# Altium PCB 拼版-max7219-tm1638-MOS板mp3.PcbDoc (part 1 of 2)
Units mil, origin at the board's own origin, x right, y up, seen from the top; angles counter-clockwise.
Board outline 3937.01 x 3937.01 mil, 2 copper layers (Top Layer, Bottom Layer); 103 components, 91 nets, 367 pads, 134 vias.
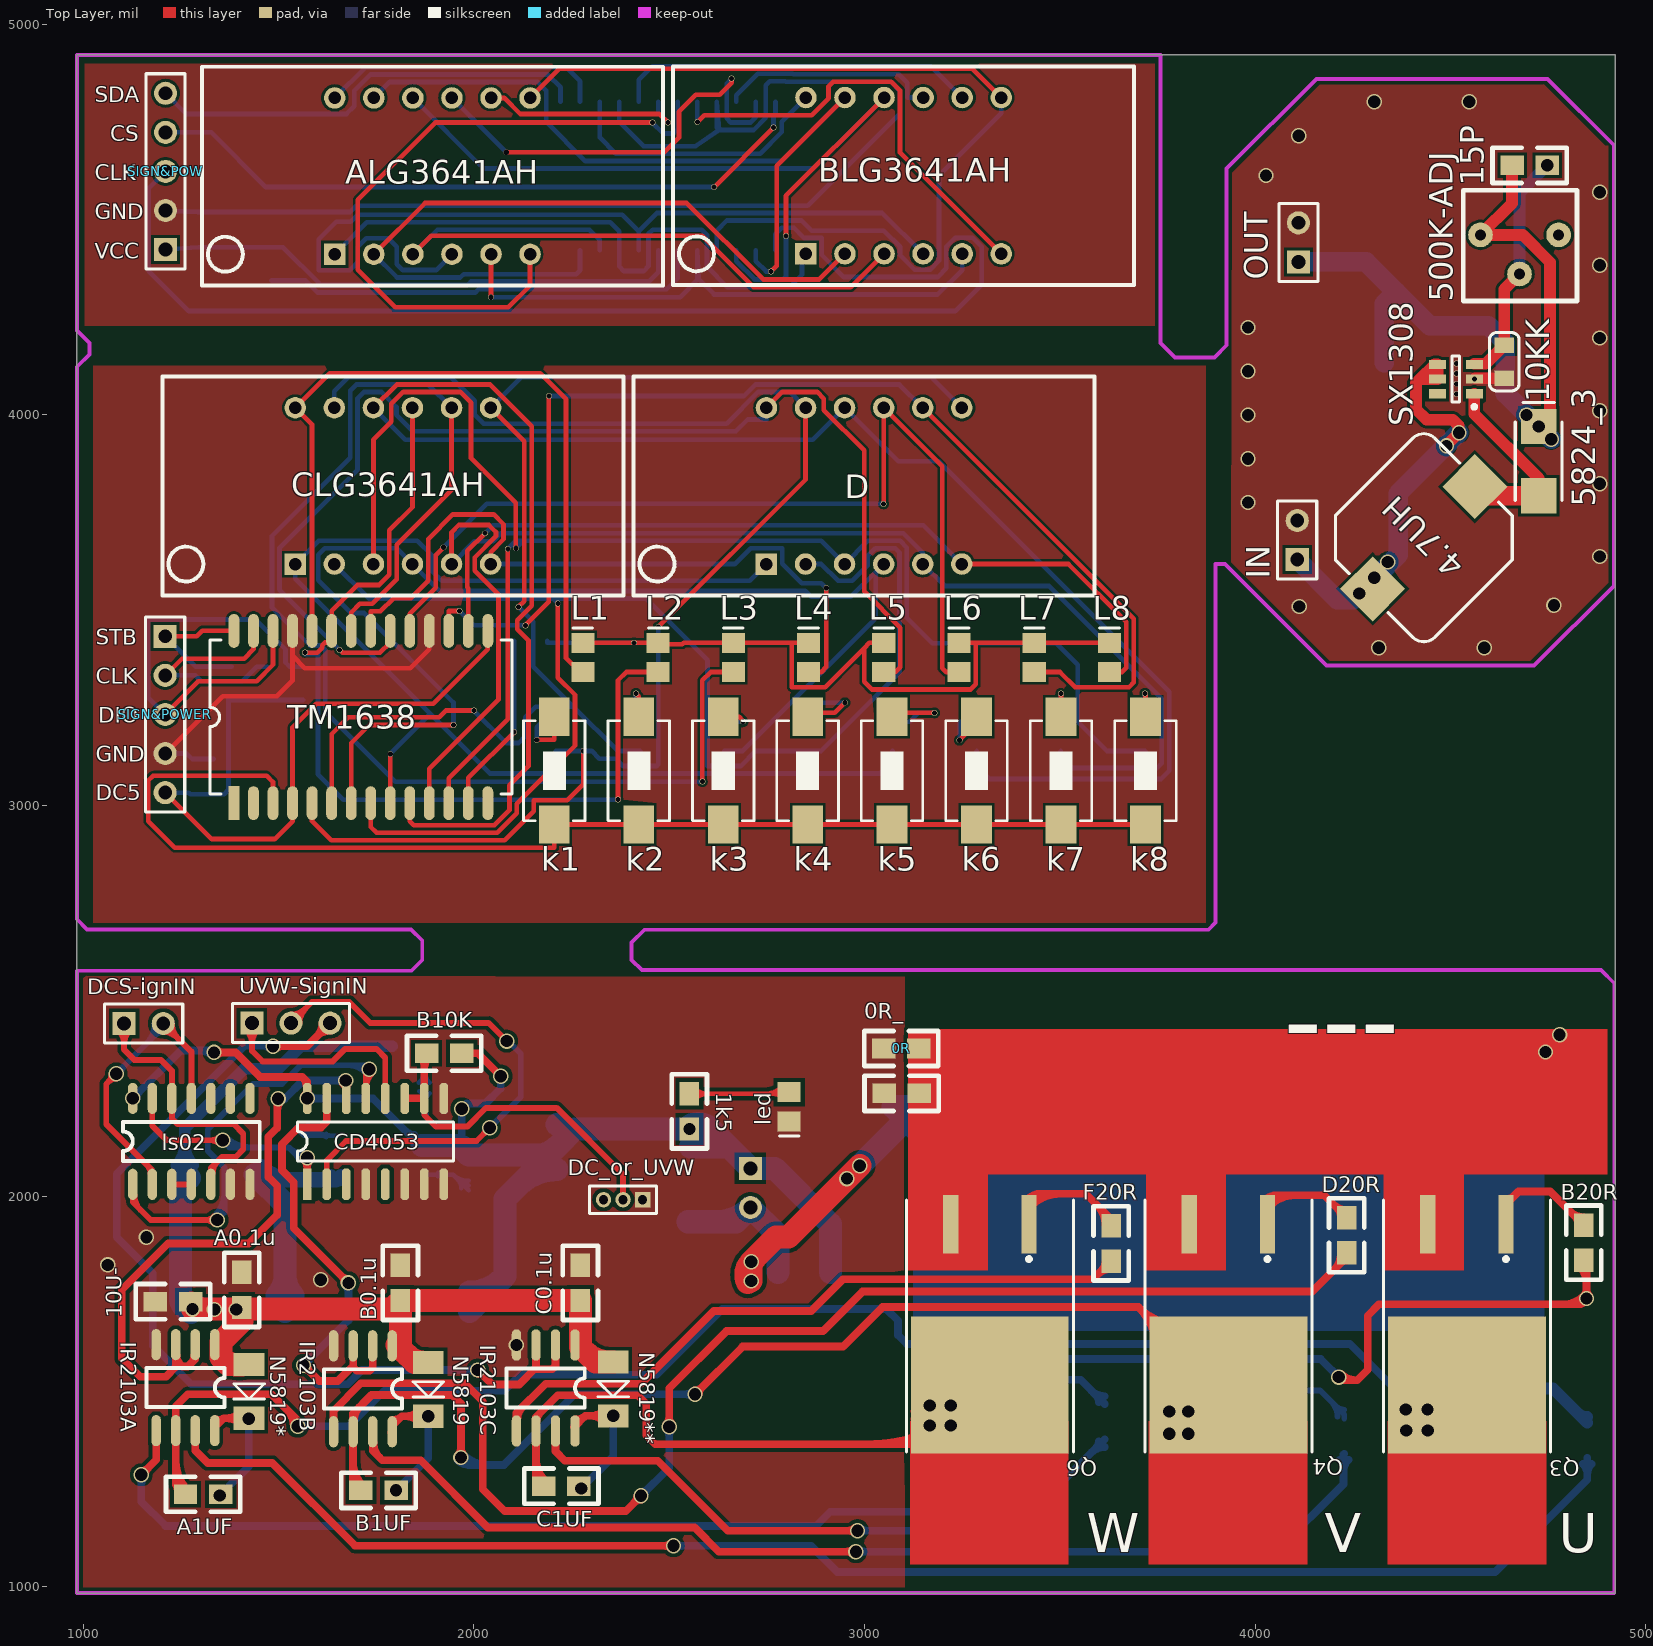
[diagram p0: Top Layer view]
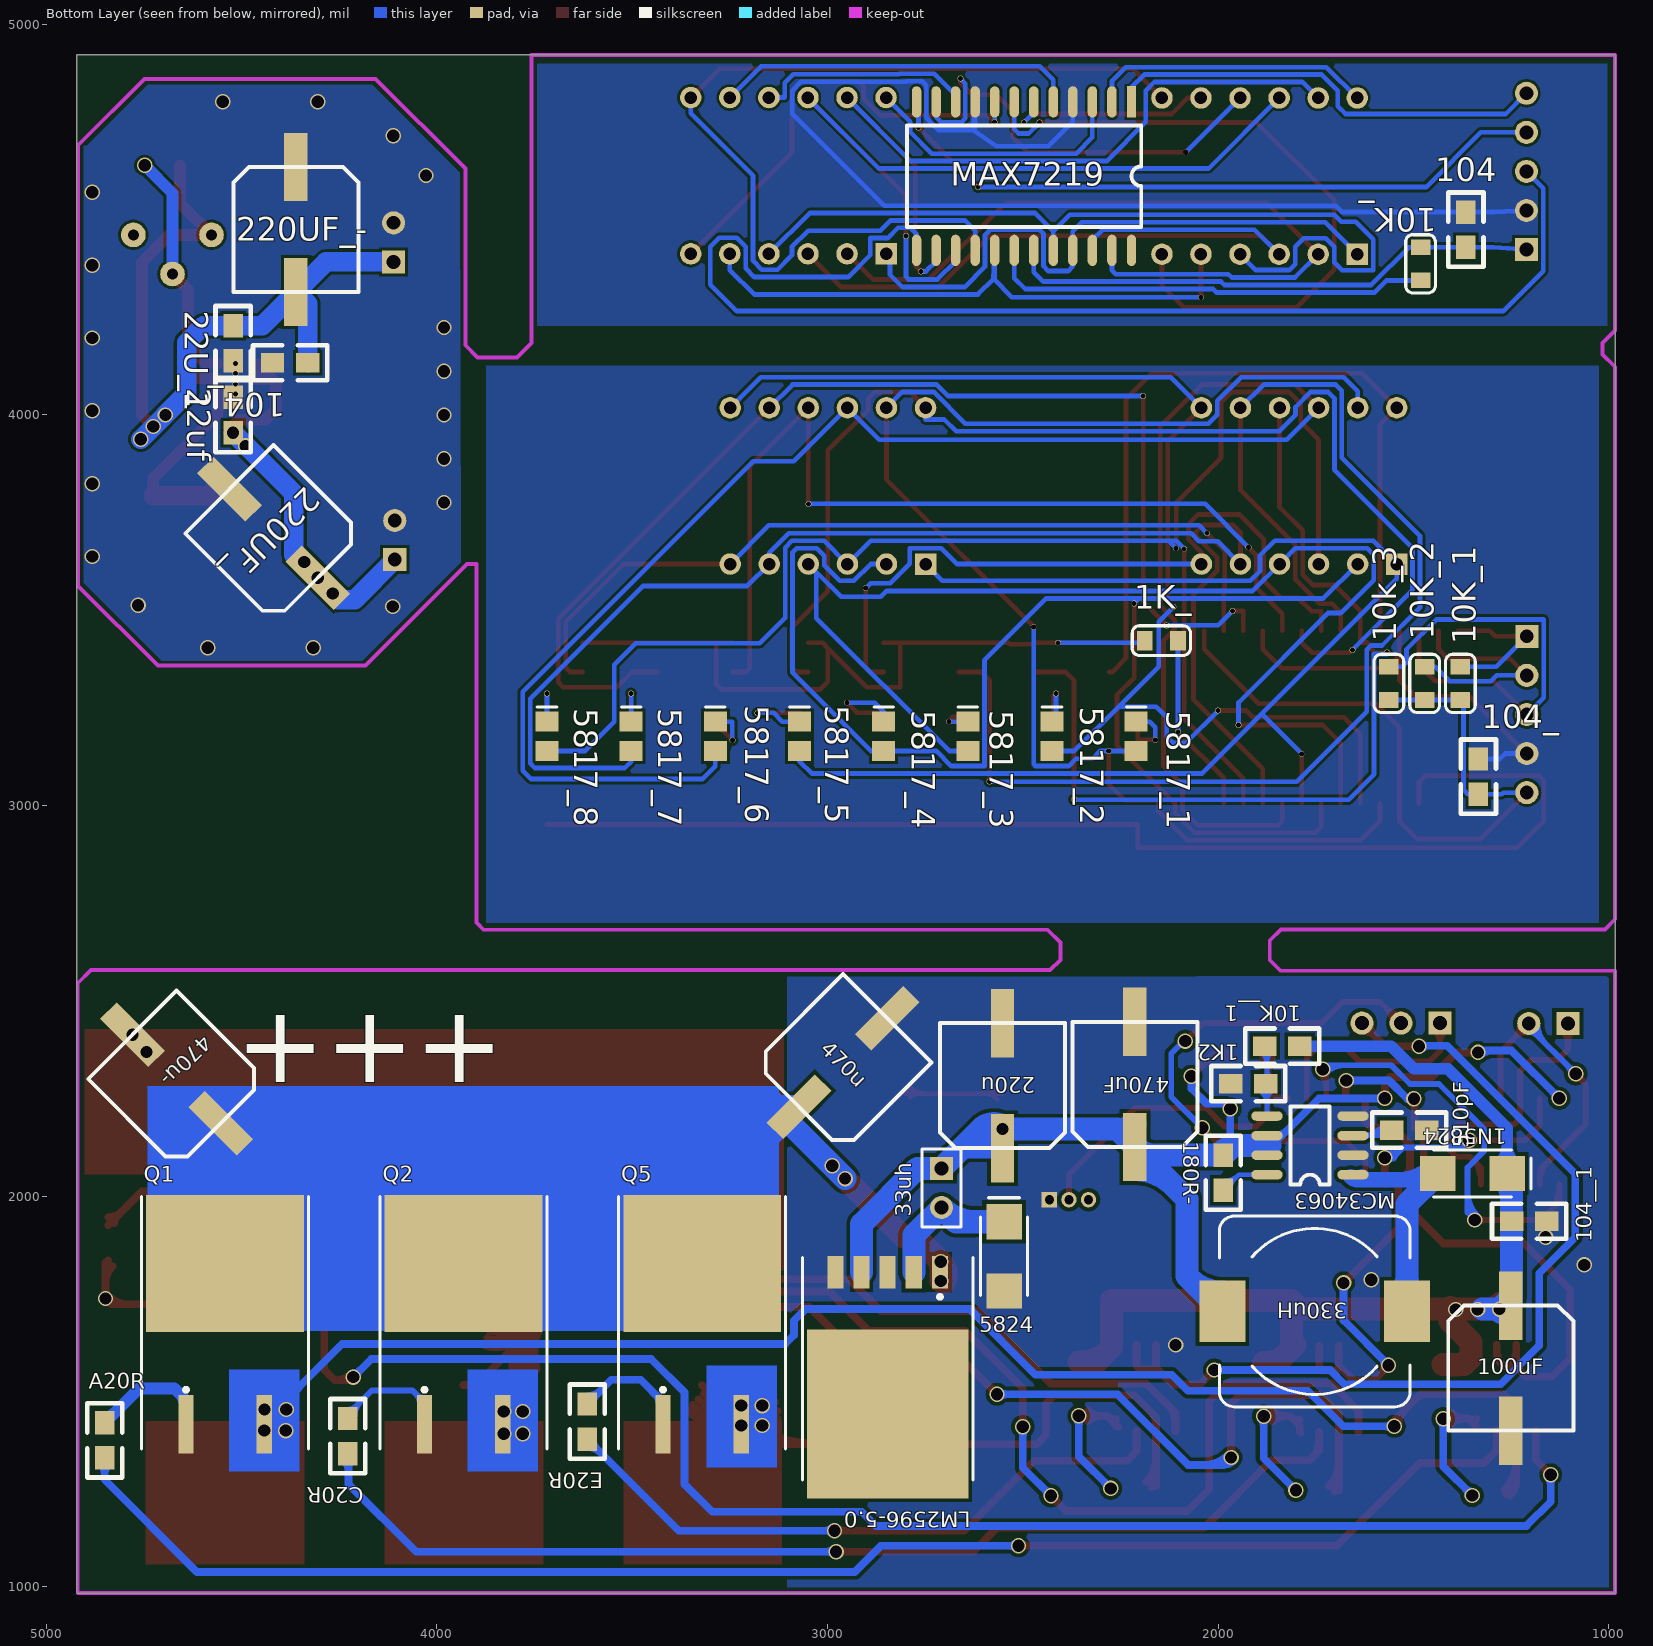
[diagram p1: Bottom Layer view, seen from below]

## Layer stack, top to bottom
Top Layer: signal copper 1.4
Dielectric: dielectric 12.6, FR-4, Dk 4.8
Bottom Layer: signal copper 1.4

## Board outline
984.25,984.25 4921.26,984.25 4921.26,4921.26 984.25,4921.26

## Design rules (kind name [scope] priority, off if disabled: settings)
Clearance [All] p1: gap=7
ComponentClearance [All] p1 off: gap=10 collisioncheckmode=3 verticalgap=10 showdistances=FALSE
PolygonConnect [All] p1: connectstyle=Direct reliefconductorwidth=10 reliefentries=4 polygonreliefangle="90 Angle"
RoutingVias [All] p1: holewidth=12 width=15 viastyle="Through Hole" minholewidth=12 minwidth=15 maxholewidth=100 maxwidth=100
SilkscreenOverComponentPads [All] p1: minsilkscreentomaskgap=10
SolderMaskExpansion [All] p1: expansion=4
Width Width_1 [All] p1: maxlimit=200 minlimit=8 preferedwidth=15
26 further rules are at their usual default settings.

## Classes and differential pairs
component class Sheet1: 1K_4_- 1K_5__ 10k_3_ 104-

## Components (designator, comment, footprint, x,y, rotation, side; value= is the part's Value field where it differs from the comment)
0R "Res2" 0805 3049,2378 r0 top
0R_ "Res2" 0805 3050,2263 r0 top
1K2 "1K2" 0805 1878,2288 r0 bottom
1k5 "1K5" 0805 2552,2172 r90 top
1K_ "Res2" "RES 0805_1" 2188,3422 r180 bottom
1N5824 "1N5819" DIODE-SMA 1349,2058 r180 bottom
4.7UH "Inductor" L-SMD-10 4431.6,3685.4 r225 top
10K_ "Res2" "RES 0805_1" 1482,4429 r270 bottom
10K_1 "Res2" "RES 0805_1" 1380,3270 r90 bottom
10K_2 "Res2" "RES 0805_1" 1471.5,3270 r90 bottom
10k_3 "Res2" "RES 0805_1" 1563,3270 r90 bottom
10K__1 "10K" 0805 1791,2384 r0 bottom (schematic designator 10K_)
10KK "Res2" "RES 0805_1" 4637.6,4178.4 r270 top
10U- "0.1u2" 0805 1275,1730 r180 top
15P "Cap" 0805_C 4747.6,4638.4 r180 top
22U_1 "Cap" 0805_C 4521.6,4228.4 r270 bottom (schematic designator 22U)
22uf "Cap" 0805_C 4521.6,3954.4 r90 bottom
33uh "Header 2" HDR1X2 2708,2071 r270 bottom
100uF "100uF/25V/C" capso_8*10 1251,1560 r90 bottom
104 "Cap" 0805_C 1366,4429 r90 bottom
104_ "Cap" 0805_C 1334,3029.03 r90 bottom
104_- "Cap" 0805_C 4330.6,4133.4 r0 bottom
104__1 "0.1u2" 0805 1249,1936 r180 bottom (schematic designator 104_)
180R- "180R" 0805 1987,2015 r90 bottom
220u "Cap" capso_8*10 2552,2283 r270 bottom
220UF_ "Cap Pol1" capso_8*10 4417.6,3696.4 r225 bottom
220UF_- "Cap Pol1" capso_8*10 4360.6,4474.4 r90 bottom
330uH "330uH" L-SMD-12 1753,1705 r0 bottom
470u "Cap" capso_8*10 2960,2342 r315 bottom
470u- "CAP 220" capso_8*10 4666,2300 r225 bottom
470uF "470uF/25V/D" capso_8*10 2213,2286 r270 bottom
500K-ADJ "MHDR1X3" pot（正方形） 4618.6,4535.4 r270 top
510pF "510pF" 0805 1466,2169 r0 bottom
5817_1 "1N5819" LED_0805 2210,3177 r90 bottom
5817_2 "1N5819" LED_0805 2425.43,3177 r90 bottom
5817_3 "1N5819" LED_0805 2640.86,3177 r90 bottom
5817_4 "1N5819" LED_0805 2856.29,3177 r90 bottom
5817_5 "1N5819" LED_0805 3071.71,3177 r90 bottom
5817_6 "1N5819" LED_0805 3287.14,3177 r90 bottom
5817_7 "1N5819" LED_0805 3502.57,3177 r90 bottom
5817_8 "1N5819" LED_0805 3718,3177 r90 bottom
5824 "Diode" DIODE-SMA 2548,1846 r90 bottom
5824_3 "1N5819" DIODE-SMA 4725.6,3881.4 r90 top
A0.1u "0.1u2" 0805 1406,1715 r90 top
A1UF "0.1u2" 0805 1262,1237 r0 top
A20R "R1" 0805 4850,1330 r90 bottom
ALG3641AH "LG5641AH" LG3641 1644,4411 r0 top
B0.1u "0.1u2" 0805 1812,1733 r90 top
B1UF "0.1u2" 0805 1711,1247 r0 top
B10K "Res2" 0805 1879,2366 r0 top
B20R "R3" 0805 4841,1836 r90 top
BLG3641AH "LG5641AH" LG3641 2850,4412 r0 top
C0.1u "0.1u2" 0805 2273,1733 r90 top
C1UF "0.1u2" 0805 2179,1258 r0 top
C20R "R2" 0805 4228,1431 r270 bottom
CD4053 "Header 8X2A" SOP16 1730,2138 r0 top
CLG3641AH "LG5641AH" LG3641 1543,3618 r0 top
D "LG5641AH" LG3641 2749,3618 r0 top
D20R "R4" 0805 4234,1945 r270 top
DC_or_UVW "MHDR1X3" MHDR1X3 2432,1991 r180 top
DCS-ignIN "Header 2" HDR1X2 1105,2442 r0 top
E20R "R2" 0805 3615,1468 r270 bottom
F20R "R4" 0805 3631,1924 r270 top
IN "Header 2" HDR1X2 4107.6,3629.4 r90 top
IR2103A "Header 4X2A" SOP8 1262,1505 r270 top
IR2103B "Header 4X2A" SOP8 1716,1502 r270 top
IR2103C "Header 4X2A" SOP8 2184,1504 r270 top
k1 "SW-PB" SW_PB2_A1 2206,3087 r0 top
k2 "SW-PB" SW_PB2_A1 2422.14,3087 r0 top
k3 "SW-PB" SW_PB2_A1 2638.29,3087 r0 top
k4 "SW-PB" SW_PB2_A1 2854.43,3087 r0 top
k5 "SW-PB" SW_PB2_A1 3070.57,3087 r0 top
k6 "SW-PB" SW_PB2_A1 3286.71,3087 r0 top
k7 "SW-PB" SW_PB2_A1 3502.86,3087 r0 top
k8 "SW-PB" SW_PB2_A1 3719,3087 r0 top
L1 "LED" LED_0805 2279,3379 r90 top
L2 "LED" LED_0805 2471.57,3379 r90 top
L3 "LED" LED_0805 2664.14,3379 r90 top
L4 "LED" LED_0805 2856.71,3379 r90 top
L5 "LED" LED_0805 3049.29,3379 r90 top
L6 "LED" LED_0805 3241.86,3379 r90 top
L7 "LED" LED_0805 3434.43,3379 r90 top
L8 "LED" LED_0805 3627,3379 r90 top
led "LED" LED_0805 2807,2229 r270 top
LM2596-5.0 "LM2596S" TO-263-5 2846,1639 r0 bottom
ls02 "74ls02" SO-14 1127,2030.32 r90 top
MAX7219 "Header 12X2A" SO-24W 2222,4800 r270 bottom
MC34063 "MC34063" SOP8 1770,2130 r0 bottom
N5819 "1N5819" D1206 1884,1575 r270 top
N5819* "1N5819" D1206 1425,1570 r270 top
N5819** "1N5819" D1206 2357,1576 r270 top
OUT "Header 2" HDR1X2 4110.6,4391.4 r90 top
Q1 "LR7843" TO-263 4542,1621.8 r180 bottom
Q2 "LR7843" TO-263 3931.5,1621.8 r180 bottom
Q3 "LR7843" TO-263 4542,1722 r180 top
Q4 "LR7843" TO-263 3931.5,1722 r180 top
Q5 "LR7843" TO-263 3321,1621.8 r180 bottom
Q6 "LR7843" TO-263 3321,1722 r180 top
SIGN&POW "Header 5" HDR1X5 1211,4423 r90 top
SIGN&POWER "Header 5" HDR1X5 1210,3433 r270 top
SX1308 "Header 3X2A" SOT23-6 4513.6,4091.4 r180 top
TM1638 "Header 14X2A" SOP28 1386,3006 r90 top
UVW-SignIN "Header 3" HDR1X3 1432,2443 r0 top

## Footprints (in the part's own frame and the unit in brackets; to place one, negate y for a bottom-side part, rotate by r counter-clockwise, add the part's x,y. Pads: shape width x height; smd on the part's side, far side on the other; paste and mask are expansions set on the pad)
0805 [mil]
  rect 60x50 smd: 1(0,0) 2(90,0)
  silkscreen extent -50,-45 140,45
0805_C [mil]
  rect 60x50 smd: 1(0,0) 2(90,0)
  silkscreen extent -50,-45 140,45, body extent 6,-25 84,25, height 31
capso_8*10 [mil]
  rect 175x60 smd: 1(160,0) 2(-160,0)
  silkscreen extent -160,-160 160,160, body extent -192,-162 198,164, height 402
D1206 [mm]
  rect 1.5x2 smd: 1(0.015,-0.01) 2(3.515,-0.01)
  silkscreen extent 1.26,-1.01 2.26,0.99
DIODE-SMA [mm] "贴?"
  rect 2.3x2.3 smd: 1(-2.25,0) 2(2.25,0)
  silkscreen extent -2.54,-1.52 3.81,1.52, body extent -2.92,-1.4 2.92,1.4, height 3
HDR1X2 [mm] "Connector; Header; 2 Position"
  rect 1.5x1.5 hole 0.9: 1(0,0)
  round 1.5 hole 0.9: 2(2.54,0)
  silkscreen extent -1.27,-1.27 3.81,1.27
HDR1X3 [mm] "Connector; Header; 3 Position"
  rect 1.5x1.5 hole 0.9: 1(0,0)
  round 1.5 hole 0.9: 2(2.54,0) 3(5.08,0)
  silkscreen extent -1.27,-1.27 6.35,1.27
HDR1X5 [mm] "Connector; Header; 5 Position"
  rect 1.5x1.5 hole 0.9: 1(0,0)
  round 1.5 hole 0.9: 2(2.54,0) 3(5.08,0) 4(7.62,0) 5(10.16,0)
  silkscreen extent -1.27,-1.27 11.43,1.27
L-SMD-10 [mm]
  rect 3x3 smd: 1(-4.699,0) 2(4.699,0)
  silkscreen extent -5.08,-5.08 5.08,5.08, body extent -5.08,-5.08 5.08,5.08, height 4
L-SMD-12 [mm] "贴?"
  rect 3x4 smd: 1(-6,0) 2(6,0)
  silkscreen extent -6.2,-6.2 6.2,6.2, body extent -6.21,-6.23 6.21,6.18, height 2.5
LED_0805 [mm] "贴?"
  rect 1.3x1.5 smd: 1(-0.95,0) 2(0.95,0)
  silkscreen extent 1.91,-0.64 1.91,0.63
LG3641 [mil]
  rect 55x55 hole 32: 1(0,0)
  round 55 hole 32: 2(100,0) 3(200,0) 4(300,0) 5(400,0) 6(500,0) 7(500,400) 8(400,400) 9(300,400) 10(200,400) 11(100,400) 12(0,400)
  silkscreen extent -340,-80 840,480
MHDR1X3 [mm] "Connector; Header; 3 Position"
  rect 1x1 hole 0.6: 1(0,0)
  round 1 hole 0.6: 2(1.27,0) 3(2.54,0)
  silkscreen extent -0.9,-0.9 3.44,0.9
pot（正方形） [mm]
  round 1.6 hole 0.7: 1(1.905,-1.067) 2(4.445,1.473) 3(1.905,4.013)
  silkscreen extent -0.99,-2.18 6.2,5.21
"RES 0805_1" [mil]
  rect 40x50 smd: 1(0,0) 2(85,0)
  silkscreen extent -32,-38 117,38, body extent 3,-25 82,25, height 30
SO-14 [mil]
  oval 80x24 smd: 1(0,0) 2(0,-50) 3(0,-100) 4(0,-150) 5(0,-200) 6(0,-250) 7(0,-300) 8(220,-300) 9(220,-250) 10(220,-200) 11(220,-150) 12(220,-100) 13(220,-50) 14(220,0)
  silkscreen extent 60,-325 160,25
SO-24W [mil]
  rect 80x24 smd: 1(-1,0)
  oval 80x24 smd: 2(-1,-50) 3(-1,-100) 4(-1,-150) 5(-1,-200) 6(-1,-250) 7(-1,-300) 8(-1,-350) 9(-1,-400) 10(-1,-450) 11(-1,-500) 12(-1,-550) 13(379,-550) 14(379,-500) 15(379,-450) 16(379,-400) 17(379,-350) 18(379,-300) 19(379,-250) 20(379,-200) 21(379,-150) 22(379,-100) 23(379,-50) 24(379,0)
  silkscreen extent 59,-575 319,25
SOP8 [mil]
  oval 80x24 smd: 1(-115,75) 2(-115,25) 3(-115,-25) 4(-115,-75) 5(105,-75) 6(105,-25) 7(105,25) 8(105,75)
  silkscreen extent -55,-100 45,100, body extent -126,-95 110,97, height 67
SOP16 [mil]
  rect 22x80 smd: 1(-156.57,-107.68)
  oct 22x80 smd: 2(-106.57,-107.68) 3(-56.57,-107.68) 4(-6.57,-107.68) 5(43.43,-107.68) 6(93.43,-107.68) 7(143.43,-107.68) 8(193.43,-107.68) 9(193.43,112.32) 10(143.43,112.32) 11(93.43,112.32) 12(43.43,112.32) 13(-6.57,112.32) 14(-56.57,112.32) 15(-106.57,112.32) 16(-156.57,112.32)
  silkscreen extent -182,-48 218,52
SOP28 [mm]
  rect 2.2x0.7 smd: 1(0,0)
  oval 2.2x0.7 smd: 2(0,-1.27) 3(0,-2.54) 4(0,-3.81) 5(0,-5.08) 6(0,-6.35) 7(0,-7.62) 8(0,-8.89) 9(0,-10.16) 10(0,-11.43) 11(0,-12.7) 12(0,-13.97) 13(0,-15.24) 14(0,-16.51) 15(11.2,-16.51) 16(11.2,-15.24) 17(11.2,-13.97) 18(11.2,-12.7) 19(11.2,-11.43) 20(11.2,-10.16) 21(11.2,-8.89) 22(11.2,-7.62) 23(11.2,-6.35) 24(11.2,-5.08) 25(11.2,-3.81) 26(11.2,-2.54) 27(11.2,-1.27) 28(11.2,0)
  silkscreen extent 0.59,-18.08 10.62,1.57
SOT23-6 [mm] "Max4173"
  rect 1.1x0.6 smd: 1(-1.2,0.95) 2(-1.2,0) 3(-1.2,-0.95) 4(1.2,-0.95) 5(1.2,0) 6(1.2,0.95)
  silkscreen extent -1.33,-1.5 0.25,1.92, body extent -0.87,-1.5 0.87,1.5, height 1.45
SW_PB2_A1 [mm]
  rect 2x2.5 smd: 1(0,3.556) 2(0,-3.444)
  silkscreen extent -2,-3.19 2,3.31, body extent -2.03,-3.17 2.03,3.3, height 1.2
TO-263 [mm] "D2-PAK/TO-263-AB; 3 Leads (1 Cropped); Body 15.9 (inc."
  rect 1x3.81 smd: 1(-2.54,-5.225) 3(2.54,-5.225)
  rect 10.25x8.9 smd: 4(0,5.225)
  silkscreen extent -5.43,-6.83 5.43,9.57
TO-263-5 [mm]
  rect 1.05x2.1 smd: 1(-3.4,-4.225) 2(-1.7,-4.225) 3(0,-4.225) 4(1.7,-4.225) 5(3.4,-4.225)
  rect 10.5x11 smd: 6(0,4.987)
  silkscreen extent -5.55,-5.18 5.55,9.28, body extent -5.33,-4.7 5.33,10.29, height 3

## Part data
0R 0R_ B10K: "Resistor"
1K2 10K__1 180R- A20R B20R C20R D20R E20R F20R: library part Res2, "Resistor"
1N5824: library part "Diode 1N4007", "1 Amp General Purpose Rectifier"
4.7UH: "µç¸"
10U- 104__1 510pF A0.1u A1UF B0.1u B1UF C0.1u C1UF: library part Cap, "Capacitor"
33uh DCS-ignIN IN OUT: "Header, 2-Pin"
100uF 470uF: library part "Cap Pol1", "Polarized Capacitor (Radial)"
220u 470u: "无?"
220UF_ 220UF_-: "Polarized Capacitor (Radial)"
330uH: library part "Inductor Iron", "Magnetic-Core Inductor"
5817_1 5817_2 5817_3 5817_4 5817_5 5817_6 5817_7 5817_8 5824_3: library part "Diode 1N4001", "1 Amp General Purpose Rectifier"
5824: "Default Diode"
CD4053: "Header, 8-Pin, Dual row"
DC_or_UVW UVW-SignIN: "Header, 3-Pin"
IR2103A IR2103B IR2103C: "Header, 4-Pin, Dual row"
k1 k2 k3 k4 k5 k6 k7 k8: "Î¢¶"
LM2596-5.0: "NS SIMPLE SWITCHER?Power Con"
MAX7219: "Header, 12-Pin, Dual row"
MC34063: library part Component_1
N5819 N5819* N5819**: library part "Diode 1N4934", "1 Amp Fast Recovery"
Q1 Q2 Q3 Q4 Q5 Q6: library part NMOS-2, "N-Channel Power MOSFET"
SIGN&POW SIGN&POWER: "Header, 5-Pin"
SX1308: "Header, 3-Pin, Dual row"
TM1638: "Header, 14-Pin, Dual row"

## Via types
v1: diameter 39.37, hole 31.5, Top Layer to Bottom Layer, 89 vias
v2: diameter 15, hole 13, Top Layer to Bottom Layer, 45 vias

## Nets (pads, with @x,y where several pads share a name; then routed paths per layer and width w, separated by ;. In a path a pad name is that pad's centre, name@x,y a point inside that pad or via, vN(x,y) a via of type N, cw(c..) or ccw(c..) an arc to the next point about the centre after c; other vN are vias at no path point)
00: 
11: 
22: 
33: 
44: 
55: 
66: 
77: 
88: 
99: 
555_OUT: 
+3V3: 
A: 
AD-DRV: 
CLOCK: 
COM: 
COM_TO: 
CP: 
CPN: 
CPP: 
CS: 
DIG_VCC: 
FG: 
FR: 
FS: 
GND: 
GND_DRV: 
GROUND_DRV: 
KEY1: 
KEY2: 
KEY3: 
KEY4: 
KEY5: 
LD: 
MCU_PWM: 
Net0R_1_2: 
Net0R_4_1: 
Net0R_5_1: 
Net1K_1_1: 
Net1K_3_1: 
Net1K_4_1: 
Net1K_4_-_1: 
Net1K_5_1: 
Net1K_5___1: 
Net1K_6_1: 
Net1K_6_2: 
Net1uf__1: 
Net5k_adj_1: 
Net10k_0_1: 
Net10k_2__1: 
Net10k_3__2: 
Net100p_2: 
Net104_555_2: 
Net500k_adj_3: 
Net5824_3_1: 
Net5824_3_2: 
NetCD4001_3: 
NetCD4001_4: 
NetCD4001_11: 
NetI/O_4: 
NetI/O_5: 
NetI/O_6: 
NRST: 
OSCIN: 
OSCOUT: 
PWM: 
Q1: 
Q1-: 
Q2: 
Q2-: 
Q3: 
Q3-: 
Q11: 
Q33: 
Q55: 
Q111: 
Q333: 
RD: 
RX: 
SCL: 
SDA: 
SWIM: 
TX: 
U: 
V: 
V5: 
VCC: 
VCC_DRV: 
VCP: 
W: 
传5V: 
pads on no net: 0R.1 0R.2 0R_.1 0R_.2 1K2.1 1K2.2 1k5.1 1k5.2 1K_.1 1K_.2 1N5824.1 1N5824.2 4.7UH.1 4.7UH.2 10K_1.1 10K_1.2 10K_2.1 10K_2.2 10k_3.1 10k_3.2 10K_.1 10K_.2 10K__1.1 10K__1.2 10KK.1 10KK.2 10U-.1 10U-.2 15P.1 15P.2 22U_1.1 22U_1.2 22uf.1 22uf.2 33uh.1 33uh.2 100uF.1 100uF.2 104.1 104.2 104_-.1 104_-.2 104_.1 104_.2 104__1.1 104__1.2 180R-.1 180R-.2 220u.1 220u.2 220UF_-.1 220UF_-.2 220UF_.1 220UF_.2 330uH.1 330uH.2 470u-.1 470u-.2 470u.1 470u.2 470uF.1 470uF.2 500K-ADJ.1 500K-ADJ.2 500K-ADJ.3 510pF.1 510pF.2 5817_1.1 5817_1.2 5817_2.1 5817_2.2 5817_3.1 5817_3.2 5817_4.1 5817_4.2 5817_5.1 5817_5.2 5817_6.1 5817_6.2 5817_7.1 5817_7.2 5817_8.1 5817_8.2 5824.1 5824.2 5824_3.1 5824_3.2 A0.1u.1 A0.1u.2 A1UF.1 A1UF.2 A20R.1 A20R.2 ALG3641AH.1 ALG3641AH.2 ALG3641AH.3 ALG3641AH.4 ALG3641AH.5 ALG3641AH.6 ALG3641AH.7 ALG3641AH.8 ALG3641AH.9 ALG3641AH.10 ALG3641AH.11 ALG3641AH.12 B0.1u.1 B0.1u.2 B1UF.1 B1UF.2 B10K.1 B10K.2 B20R.1 B20R.2 BLG3641AH.1 BLG3641AH.2 BLG3641AH.3 BLG3641AH.4 BLG3641AH.5 BLG3641AH.6 BLG3641AH.7 BLG3641AH.8 BLG3641AH.9 BLG3641AH.10 BLG3641AH.11 BLG3641AH.12 C0.1u.1 C0.1u.2 C1UF.1 C1UF.2 C20R.1 C20R.2 CD4053.1 CD4053.2 CD4053.3 CD4053.4 CD4053.5 CD4053.6 CD4053.7 CD4053.8 CD4053.9 CD4053.10 CD4053.11 CD4053.12 CD4053.13 CD4053.14 CD4053.15 CD4053.16 CLG3641AH.1 CLG3641AH.2 CLG3641AH.3 CLG3641AH.4 CLG3641AH.5 CLG3641AH.6 CLG3641AH.7 CLG3641AH.8 CLG3641AH.9 CLG3641AH.10 CLG3641AH.11 CLG3641AH.12 D20R.1 D20R.2 D.1 D.2 D.3 D.4 D.5 D.6 D.7 D.8 D.9 D.10 D.11 D.12 DC_or_UVW.1 DC_or_UVW.2 DC_or_UVW.3 DCS-ignIN.1 DCS-ignIN.2 E20R.1 E20R.2 F20R.1 F20R.2 IN.1 IN.2 IR2103A.1 IR2103A.2 IR2103A.3 IR2103A.4 IR2103A.5 IR2103A.6 IR2103A.7 IR2103A.8 IR2103B.1 IR2103B.2 IR2103B.3 IR2103B.4 IR2103B.5 IR2103B.6 IR2103B.7 IR2103B.8 IR2103C.1 IR2103C.2 IR2103C.3 IR2103C.4 IR2103C.5 IR2103C.6 IR2103C.7 IR2103C.8 k1.1 k1.2 k2.1 k2.2 k3.1 k3.2 k4.1 k4.2 k5.1 k5.2 k6.1 k6.2 k7.1 k7.2 k8.1 k8.2 L1.1 L1.2 L2.1 L2.2 L3.1 L3.2 L4.1 L4.2 L5.1 L5.2 L6.1 L6.2 L7.1 L7.2 L8.1 L8.2 led.1 led.2 LM2596-5.0.1 LM2596-5.0.2 LM2596-5.0.3 LM2596-5.0.4 LM2596-5.0.5 LM2596-5.0.6 ls02.1 ls02.2 ls02.3 ls02.4 ls02.5 ls02.6 ls02.7 ls02.8 ls02.9 ls02.10 ls02.11 ls02.12 ls02.13 ls02.14 MAX7219.1 MAX7219.2 MAX7219.3 MAX7219.4 MAX7219.5 MAX7219.6 MAX7219.7 MAX7219.8 MAX7219.9 MAX7219.10 MAX7219.11 MAX7219.12 MAX7219.13 MAX7219.14 MAX7219.15 MAX7219.16 MAX7219.17 MAX7219.18 MAX7219.19 MAX7219.20 MAX7219.21 MAX7219.22 MAX7219.23 MAX7219.24 MC34063.1 MC34063.2 MC34063.3 MC34063.4 MC34063.5 MC34063.6 MC34063.7 MC34063.8 N5819**.1 N5819**.2 N5819*.1 N5819*.2 N5819.1 N5819.2 OUT.1 OUT.2 Q1.1 Q1.3 Q1.4 Q2.1 Q2.3 Q2.4 Q3.1 Q3.3 Q3.4 Q4.1 Q4.3 Q4.4 Q5.1 Q5.3 Q5.4 Q6.1 Q6.3 Q6.4 SIGN&POW.1 SIGN&POW.2 SIGN&POW.3 SIGN&POW.4 SIGN&POW.5 SIGN&POWER.1 SIGN&POWER.2 SIGN&POWER.3 SIGN&POWER.4 SIGN&POWER.5 SX1308.1 SX1308.2 SX1308.3 SX1308.4 SX1308.5 SX1308.6 TM1638.1 TM1638.2 TM1638.3 TM1638.4 TM1638.5 TM1638.6 TM1638.7 TM1638.8 TM1638.9 TM1638.10 TM1638.11 TM1638.12 TM1638.13 TM1638.14 TM1638.15 TM1638.16 TM1638.17 TM1638.18 TM1638.19 TM1638.20 TM1638.21 TM1638.22 TM1638.23 TM1638.24 TM1638.25 TM1638.26 TM1638.27 TM1638.28 UVW-SignIN.1 UVW-SignIN.2 UVW-SignIN.3